# Altium PCB fsm.PcbDoc
Units mm, origin at the board's own origin, x right, y up, seen from the top; angles counter-clockwise.
Board outline 111 x 53 mm, 2 copper layers (Top Layer, Bottom Layer), stack 1.1 mm thick; 14 components, 24 nets, 102 pads, 16 vias.
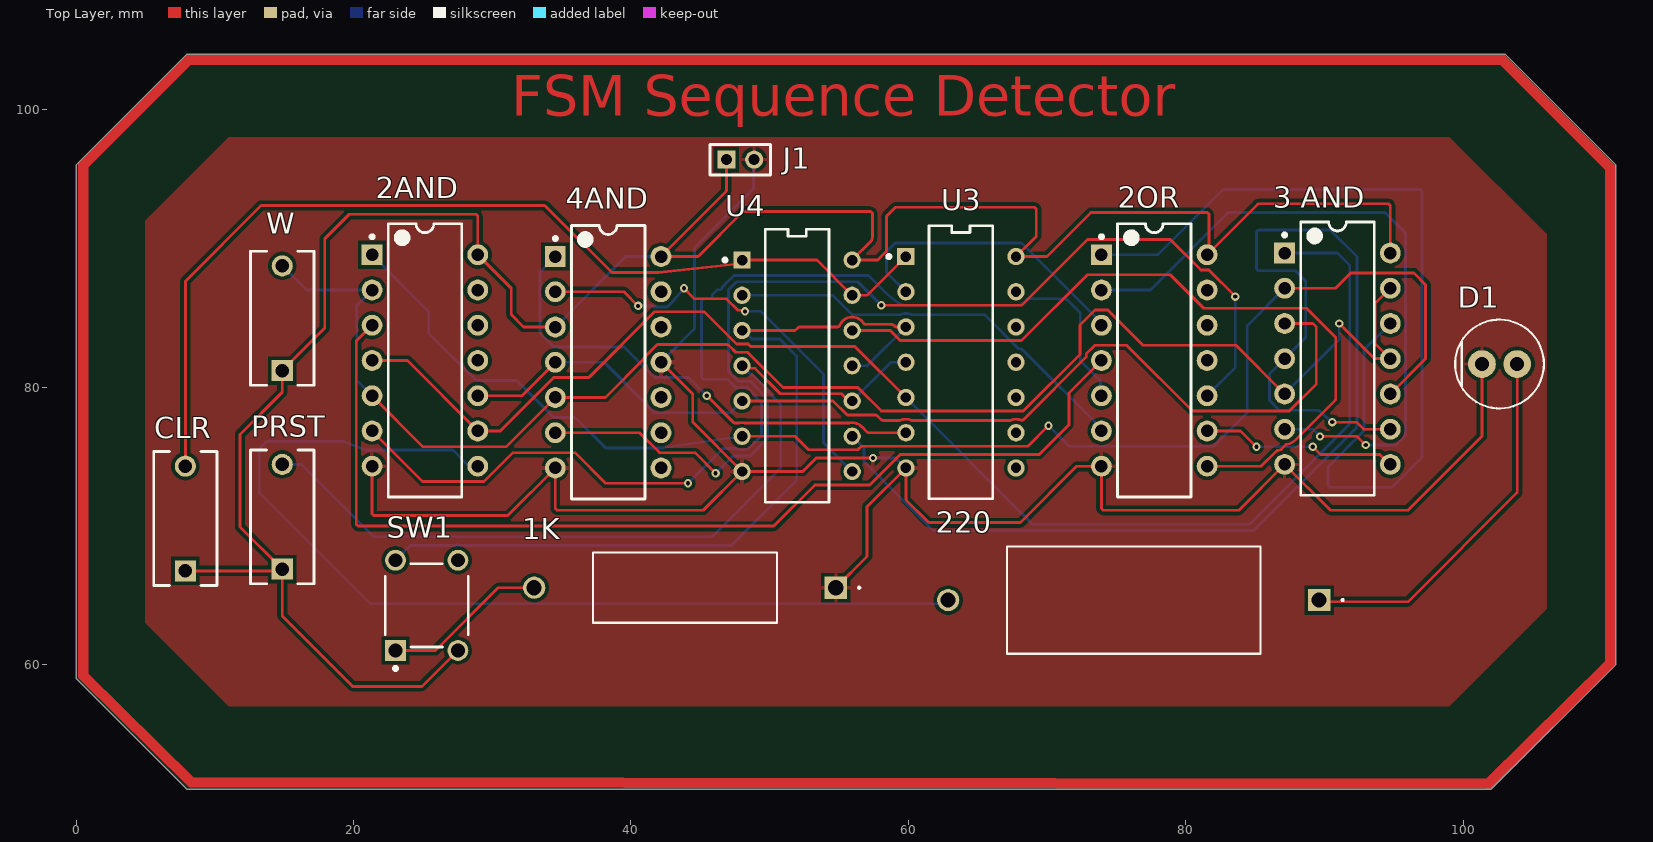
[diagram p0: Top Layer view]
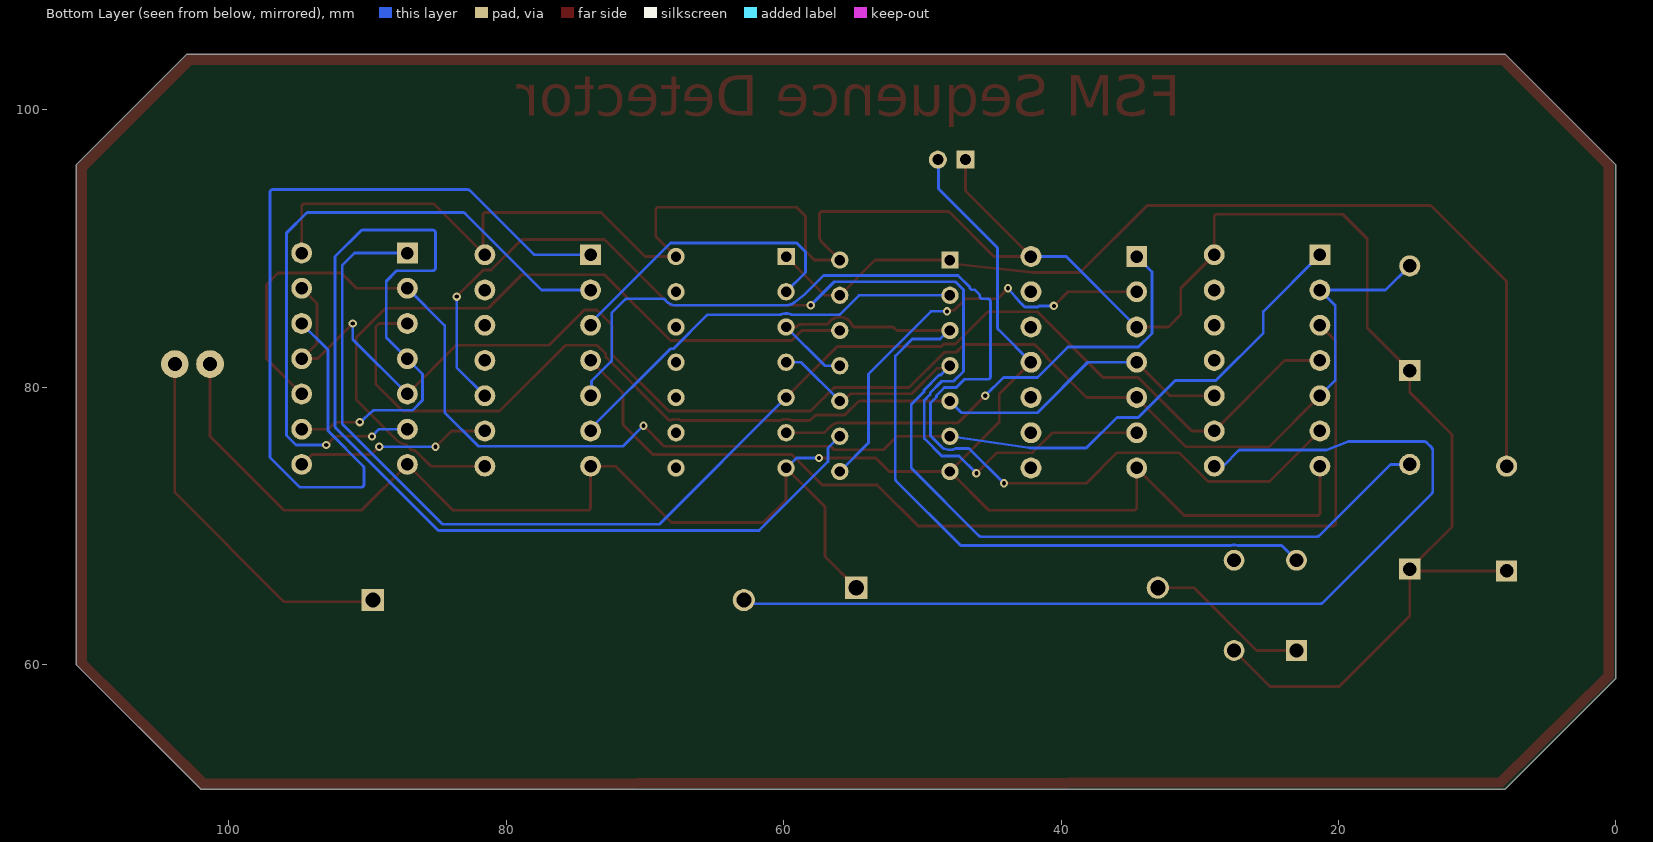
[diagram p1: Bottom Layer view, seen from below]
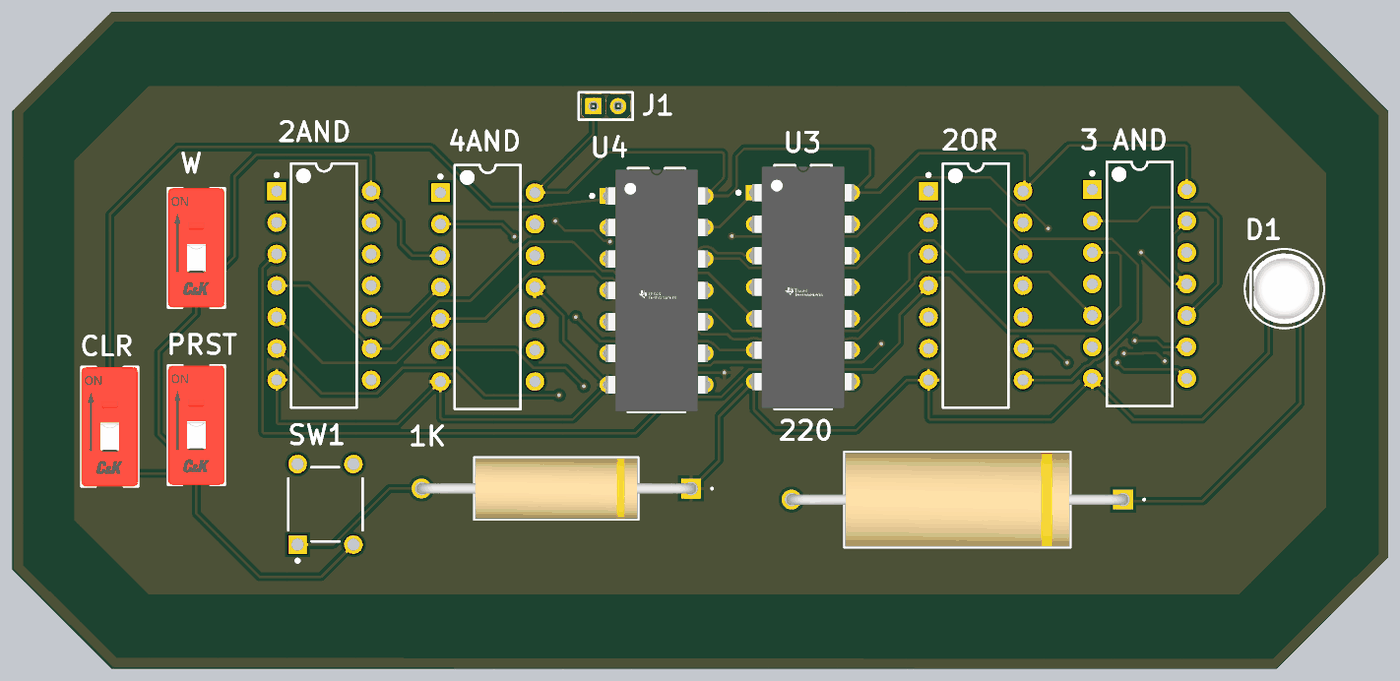
[diagram p2: 3D render of the assembled board from above, using the file's embedded part models]

## Layer stack, top to bottom
Top Solder: solder mask 0.05, SM-001, Dk 4
Top Layer: signal copper 0.1
Dielectric 1: dielectric 0.9, FR-4, Dk 4.8
Bottom Layer: signal copper 0.1
Bottom Solder: solder mask 0.05, SM-001, Dk 4

## Board outline
8,51 102,51 111,60 111,96 103,104 8,104 0,96 0,59

## Design rules (kind name [scope] priority, off if disabled: settings)
Clearance [All] p1: gap=0.25 ignorepadtopadclearanceinfootprint=FALSE
PolygonConnect [All] p1: connectstyle=Relief reliefconductorwidth=0.254 reliefentries=4 polygonreliefangle="90 Angle" airgapwidth=0.254
RoutingVias [All] p1: holewidth=0.4 width=0.5 viastyle="Through Hole" minholewidth=0.4 minwidth=0.5 maxholewidth=0.4 maxwidth=0.5
SolderMaskExpansion [All] p1: expansion=0.102 istentingtop=FALSE
UnpouredPolygon [All] p1: allowunpoured=TRUE allowshelved=TRUE
Width [All] p1: maxlimit=0.751 minlimit=0.1 preferedwidth=0.2
29 further rules are at their usual default settings.

## Classes and differential pairs
component class fsm: 1K 2AND 2OR "3 AND" 220 CLR D1 J1 PRST SW1 U3 U4 W

## Components (designator, comment, footprint, x,y, rotation, side; value= is the part's Value field where it differs from the comment)
1K "AC03000001001JAC00" RES_AC03_VIS 54.762,65.532 r180 top (schematic designator R2)
2AND "SN74AC08N" N0014A 25.146,81.915 r0 top (schematic designator U6)
2OR "SN74AHC32N" N0014A 77.724,81.915 r0 top (schematic designator U2)
"3 AND" "SN74LS11N" N0014A 90.932,82.042 r0 top (schematic designator U1)
4AND "SN74LS21N" N0014A 38.354,81.788 r0 top (schematic designator U5)
220 "AC05000002200JAC00" RES_AC05_VIS 89.611,64.643 r180 top
CLR "CLR" FP-BD01-MFG 7.874,70.52 r0 top (schematic designator SW2)
D1 "SFH 4550" FP-SFH_4550-MFG 102.616,81.661 r0 top
J1 "M22-2510205" FP-M22-2510205-MFG 47.879,96.393 r0 top
PRST "PRST" FP-BD01-MFG 14.859,70.647 r0 top (schematic designator SW3)
SW1 "1825910-6" TECO-1825910-6_V 25.273,64.262 r90 top
U3 "SN74HCT74N" FP-N0014A-MFG 63.787,81.788 r0 top
U4 "SN74HCT74N" FP-N0014A-MFG 51.976,81.534 r0 top
W "BD01" FP-BD01-MFG 14.859,84.963 r0 top

## Footprints (in the part's own frame and the unit in brackets; to place one, negate y for a bottom-side part, rotate by r counter-clockwise, add the part's x,y. Pads: shape width x height; smd on the part's side, far side on the other; paste and mask are expansions set on the pad)
FP-BD01-MFG [mm]
  rect 1.52x1.52 hole 0.97 paste-2539.97 mask+0: 1(0,-3.775)
  round 1.52 hole 0.97 paste-2539.97 mask+0: 2(0,3.775)
  silkscreen extent -2.28,-4.82 2.28,4.82, body extent -2.38,-4.92 2.38,4.92, height 0.25
FP-M22-2510205-MFG [mm]
  rect 1.3x1.3 hole 0.8 paste-2539.97 mask+0: 1(-1,0)
  round 1.3 hole 0.8 paste-2539.97 mask+0: 2(1,0)
  silkscreen extent -2.17,-1.1 2.17,1.1, body extent -2.27,-1.2 2.27,1.2, height 0.25
FP-N0014A-MFG [mm]
  rect 1.25x1.25 hole 0.75 paste-2539.97 mask+0: 1(-3.97,7.62)
  round 1.25 hole 0.75 paste-2539.97 mask+0: 2(-3.97,5.08) 3(-3.97,2.54) 4(-3.97,0) 5(-3.97,-2.54) 6(-3.97,-5.08) 7(-3.97,-7.62) 8(3.97,-7.62) 9(3.97,-5.08) 10(3.97,-2.54) 11(3.97,0) 12(3.97,2.54) 13(3.97,5.08) 14(3.97,7.62)
  silkscreen extent -5.32,-9.84 2.3,9.84, body extent -4.69,-9.94 4.69,9.94, height 0.25
FP-SFH_4550-MFG [mm]
  round 2 hole 1 paste-2539.97 mask+0: 1(-1.27,0) 2(1.27,0)
  silkscreen extent -3.2,-3.2 3.2,3.2, body extent -3.05,-3.05 3.05,3.05, height 0.25
N0014A [mm] "DIP, 14-Leads, Body 19.7x6.6mm, Pitch 2.54mm"
  rect 1.5x1.5 hole 0.9: 1(-3.81,7.62)
  round 1.5 hole 0.9: 2(-3.81,5.08) 3(-3.81,2.54) 4(-3.81,0) 5(-3.81,-2.54) 6(-3.81,-5.08) 7(-3.81,-7.62) 8(3.81,-7.62) 9(3.81,-5.08) 10(3.81,-2.54) 11(3.81,0) 12(3.81,2.54) 13(3.81,5.08) 14(3.81,7.62)
  silkscreen extent -3.93,-9.85 2.65,9.85, body extent -3.95,-9.85 3.95,9.85, height 5.08
RES_AC03_VIS [mil]
  rect 63x63 / inner round 60 / far side rect 63x63 hole 43 paste-99999 mask+0: 1(0,0)
  round 63 / inner round 60 / far side round 63 hole 43 paste-99999 mask+0: 2(856,0)
  silkscreen extent -70,-99 689,100, body extent -16,-95 873,95, height 189
RES_AC05_VIS [mil]
  rect 63x63 / inner round 60 / far side rect 63x63 hole 43 paste-99999 mask+0: 1(0,0)
  round 63 / inner round 60 / far side round 63 hole 43 paste-99999 mask+0: 2(1053,0)
  silkscreen extent -70,-152 886,153, body extent -16,-147 1069,147, height 295
TECO-1825910-6_V [mm] "Switch, 4-Leads, Body 5.99x5.99mm"
  rect 1.5x1.5 hole 0.99: 1(-3.25,2.25)
  round 1.5 hole 0.99: 2(3.25,2.25) 3(-3.25,-2.25) 4(3.25,-2.25)
  silkscreen extent -4.67,-2.99 2.99,3, body extent -3,-2.99 2.99,3, height 5

## Part data
1K: library part CMP-00030-39747202-1, "AC03000001001JAC00 Resistor, 1 kOhm, ± 5%, 3 W, Axial Leaded, Wirewound, General Purpose", Case/Package=Axial, Max Operating Temperature=275°C, Max Power Dissipation=3W, Min Operating Temperature=-40°C, Resistance=1kΩ, Temperature Coefficient=180ppm/°C, Tolerance=5%, Voltage Rating=55V, Composition=Wirewound, Contact Plating=Tin, Diameter=4.8mm, Features="Flame Retardant Coating", Lead Diameter=800µm, Length=13mm, Military Standard=Not, Mount="Through Hole", NexarPartId=39747202, Number of Pins=2, Number of Terminations=2, Packaging="Cut Tape (CT)", Power Rating=3W, Radiation Hardening=No, REACH SVHC=Unknown, RoHS=Compliant, Schedule B="8533210080, 8533210080", Termination=Axial, Voltage Rating (DC)=55V, Width=4.8mm
2AND: library part CMP-0777-00256-3, "Quadruple 2-Input Positive-AND Gates, N0014A, TUBE", F @ Nom Voltage(Max)(Mhz)=100, Generic Part Number=SN74AC08, ICC @ Nom Voltage(Max)(mA)=0.02, Manufacturer="Texas Instruments", Operating Temperature Range(C)="-40 to 85", Rating=Catalog, tpd @ Nom Voltage(Max)(ns)=10,8.5, Voltage(Nom)(V)=3.3,5, Bits(#)=4, DatasheetVersion=SCAS536D, Input Type=CMOS, Output Drive (IOL/IOH)(Max)(mA)=-24/24, Output Type=CMOS, PackageReference=N0014A, Schmitt Trigger=No, Technology Family=AC, VCC(Max)(V)=6, VCC(Min)(V)=2
2OR: library part CMP-1573-00149-3, "Quadruple 2-Input Positive-OR Gates, N0014A, TUBE", F @ Nom Voltage(Max)(Mhz)=70, Generic Part Number=SN74AHC32, ICC @ Nom Voltage(Max)(mA)=0.02, Manufacturer="Texas Instruments", Operating Temperature Range(C)="-40 to 125", Rating=Catalog, tpd @ Nom Voltage(Max)(ns)=13,8.5, Voltage(Nom)(V)=3.3,5, Bits(#)=4, Code_JEDEC=MS-001, DatasheetVersion=SCLS247I, Input Type=CMOS, Output Drive (IOL/IOH)(Max)(mA)=50/-50, Output Type=CMOS, PackageReference=N0014A, PackageVersion=http://www.ti.com/lit/ml/mpdi002c/mpdi002c.pdf, VCC(Max)(V)=5.5, VCC(Min)(V)=2
"3 AND": library part CMP-0777-00254-3, "Triple 3-input positive-AND gates, N0014A, TUBE", F @ Nom Voltage(Max)(Mhz)=35, Generic Part Number=SN74LS11, ICC @ Nom Voltage(Max)(mA)=0.0036, Manufacturer="Texas Instruments", Operating Temperature Range(C)="0 to 70", Rating=Catalog, tpd @ Nom Voltage(Max)(ns)=15, Voltage(Nom)(V)=5, Bits(#)=3, DatasheetVersion=SDLS131, Input Type=TTL, Output Drive (IOL/IOH)(Max)(mA)=0/8, Output Type=TTL, PackageReference=N0014A, Schmitt Trigger=No, Technology Family=LS, VCC(Max)(V)=5.25, VCC(Min)(V)=4.75
4AND: library part CMP-0777-00260-3, "Dual 4-input positive-AND gates, N0014A, TUBE", F @ Nom Voltage(Max)(Mhz)=35, Generic Part Number=SN74LS21, ICC @ Nom Voltage(Max)(mA)=0.0025, Manufacturer="Texas Instruments", Operating Temperature Range(C)="0 to 70", Rating=Catalog, tpd @ Nom Voltage(Max)(ns)=15, Voltage(Nom)(V)=5, Bits(#)=2, DatasheetVersion=SDLS139, Input Type=TTL, Output Drive (IOL/IOH)(Max)(mA)=-.04/8, Output Type=TTL, PackageReference=N0014A, Schmitt Trigger=No, Technology Family=LS, VCC(Max)(V)=5.25, VCC(Min)(V)=4.75
220: library part CMP-00030-39746845-1, "AC05000002200JAC00 Resistor, 220 Ohm, ± 5%, 5 W, Axial Leaded, Wirewound, General Purpose", Case/Package=Conformal, Max Operating Temperature=275°C, Max Power Dissipation=5W, Min Operating Temperature=-40°C, Resistance=220Ω, Temperature Coefficient=-10ppm/°C, Tolerance=5%, Voltage Rating=33V, Composition=Wirewound, Contact Plating=Tin, Diameter=7.5mm, Features="Flame Retardant Coating", Lead Diameter=800µm, Length=18mm, Military Standard=Not, NexarPartId=39746845, Number of Pins=2, Number of Terminations=2, Packaging="Cut Tape (CT)", Power Rating=5W, Radiation Hardening=No, REACH SVHC=Unknown, RoHS=Compliant, Schedule B="8533210080, 8533210080", Termination=Axial, Voltage Rating (DC)=33V, Width=7.493mm
CLR PRST W: library part CMP-10033-000004-1, "SWITCH SLIDE DIP SPST 100MA 5V", Capacitance=5pF, Case/Package=DIP, Contact Current Rating=25mA, Current Rating=100mA, Max Operating Temperature=85°C, Max Voltage Rating (DC)=25V, Min Operating Temperature=-40°C, Package Quantity=115, Voltage Rating (DC)=5V, Actuator Length=0.9mm, Actuator Material=Nylon, Actuator Type="Slide (Standard)", Approvals=UL, Body Material=PBT, Contact Material=Bronze, Contact Plating=Gold, Depth=9.65mm, Electrical Life=10000Cycles, Lead Free="Lead Free", Length=0.18inch, Life (Cycles)=10000Cycles, Material=Nylon, Max Current Rating=100mA, Mechanical Life=10000Cycles, Mount="Through Hole", Number of Circuits=1, Number of Poles=1, Number of Positions=1, Orientation=Straight, Packaging=Rail/Tube, Pitch=0.1inch, Radiation Hardening=No, REACH SVHC="No SVHC", RoHS Compliant=Yes, Series=BD, Terminal Pitch=2.54mm, Termination="PC Pin", Throw Configuration=SPST, Washable=Yes, Width=9.65mm
D1: library part CMP-62016-000011-1, "EMITTER IR 860NM 100MA RADIAL", Colour=Infrared, Forward Current=100mA, Forward Voltage=1.5V, Manufacturer="Osram Opto", Reverse Voltage=5V, Temperature="-40°C to +100°C", Temperature Range High=+100°C, Temperature Range Low=-40°C, Automotive=No, Category=Diode, ComponentLink2Description=Datasheet, ComponentLink2URL=https://dammedia.osram.info/media/resource/hires/osram-dam-5580407/SFH%204550_EN.pdf, Device Class L1=Optoelectronics, Device Class L2=LEDs, Device Class L3=unset, Digikey Description="EMITTER IR 860NM 100MA RADIAL", Lead Free=Yes, Led Orientation=Straight, Manufacturer Part Number="SFH 4550", Mouser Description="Infrared Emitters - High Power Infrared 850 nm HALF ANGLE +/-3DEG", Octopart=https://octopart.com/sfh+4550-osram+opto-55410894, Package="SFH 4550", Peak Emmision Wavelength=860nm, RoHS=TRUE, Viewing Angle=6°
J1: library part CMP-15831-000005-1, "CONN HEADER VERT 2POS 2MM", Current Rating=2A, Manufacturer=Harwin, Package=0, Temperature="-40°C to +105°C", Temperature Range High=+105°C, Temperature Range Low=-40°C, Automotive=No, Category=Conn, ComponentLink2Description=Datasheet, ComponentLink2URL=https://cdn.harwin.com/pdfs/C018XX_M22_Series_Connectors.pdf, Conn Gender=Male, Conn Orientation=Vertical, Contact Material=Gold,Nickel, Device Class L1=Connectors, Device Class L2="Headers and Wire Housings", Device Class L3=unset, Digikey Description="CONN HEADER VERT 2POS 2MM", Footprint Url=https://cdn.harwin.com/pdfs/M22-251.pdf, Height=5.45mm, Lead Free=Yes, Manufacturer Part Number=M22-2510205, Mouser Description="Headers & Wire Housings 2 PIN SIL VERTICAL GOLD PIN HEADER", Number Of Contacts=2, Number Of Rows=1, Octopart=https://octopart.com/m22-2510205-harwin-2538221, Pitch=2mm, RoHS=TRUE
SW1: library part CMP-1684-00021-1, "Tact Switch, SPST-NO, 0.05 A, -35 to 85 degC, 4-Pin THD, RoHS, Bulk", Actuator Color=Black, Contact Rating @ Voltage=0.05A@24VDC, Dielectric Strength=500VAC, Manufacturer="TE Connectivity", Maximum AC Voltage Rating=N/A, Maximum Contact Resistance=100mOhm, Maximum DC Voltage Rating=24V, Minimum Insulation Resistance=100MOhm, Operating Temperature=-35to85C, Package Description="4-Pin Through Hole Device, Body 5.99 x 5.99 mm, Pitch 6.5 mm", Package Reference=THD, Actuator Length=1.4mm, Actuator Material=PolybutyleneTerephthalate, Actuator Style=RoundButton, Base Material=N/A, Body Orientation=Straight, Bushing Type=Unthreaded, Contact Material=CopperAlloy, Contact Plating=Silver, Datasheet URL=http://www.te.com/commerce/DocumentDelivery/DDEController?Action=showdoc&DocId=Customer+Drawing%7F1825910%7FC9%7Fpdf%7FEnglish%7FENG_CD_1825910_C9.pdf%7F1825910-6, Datasheet Version="Rev. C9", Dimension=5.99x5mm, Electrical Life=100000Cycles, Family=1825910, Function=MomentaryContact, Housing Material=N/A, Illumination=N/R, Manufacturer URL=http://www.te.com, Mechanical Life=100000Cycles, Mounting=ThroughHole, Packaging=N/A, Part No=1825910-6, Pole Throw Configuration=SPST, Product Weight=N/A, RoHS=Yes, Seal Description=N/A, Seal Location=N/A, Switch Configuration=OFF(ON), Terminal Type=PCPins, Thread Size=N/R
U3 U4: library part CMP-1619-00757-3, "IC FF D-TYPE DUAL 1BIT 14DIP", Case/Package=PDIP, Frequency=46MHz, High Level Output Current=-4mA, Low Level Output Current=4mA, Max Frequency=24MHz, Max Operating Temperature=85°C, Max Supply Voltage=5.5V, Min Operating Temperature=-40°C, Min Supply Voltage=4.5V, Operating Supply Voltage=5V, Package Quantity=25, Quiescent Current=4uA, Clock Edge Trigger Type="Positive Edge", Contact Plating=Gold, Height=4.57mm, Lead Free="Lead Free", Length=19.3mm, Logic Function="AND GATE", Mount="Through Hole", Number of Bits=2, Number of Bits per Element=1, Number of Circuits=2, Number of Elements=2, Number of Input Lines=4, Number of Output Lines=2, Number of Pins=14, Output Current=4mA, Packaging=Rail/Tube, Polarity=Non-Inverting, Propagation Delay=28ns, Radiation Hardening=No, REACH SVHC="No SVHC", RoHS Compliant=Yes, Turn-On Delay Time=18ns, Weight=0.032734oz, Width=6.35mm

## Via types
v1: diameter 0.6, hole 0.3, Top Layer to Bottom Layer, tented both sides, 16 vias

## Nets (pads, with @x,y where several pads share a name; then routed paths per layer and width w, separated by ;. In a path a pad name is that pad's centre, name@x,y a point inside that pad or via, vN(x,y) a via of type N, cw(c..) or ccw(c..) an arc to the next point about the centre after c; other vN are vias at no path point)
GND: 1K.1 2AND.7 2OR.7 4AND.7 4AND.11 "3 AND.7" D1.1 J1.2 U3.7 U4.7 | length 146
  Top Layer w0.2: 2AND.7 21.336,70.856 21.453,70.739 31.115,70.739 4AND.7 34.544,71.237 34.661,71.12 45.212,71.12 U4.7 ; 4AND.11 44.45,79.502 44.45,77.47 U4.7 ; 1K.1 57.023,67.793 57.023,71.374 U3.7 59.817,71.965 ccw(c60.017,71.965) 59.875,71.824 61.41,70.289 ccw(c61.551,70.431) 61.551,70.231 68.072,70.231 72.136,74.295 2OR.7 73.914,71.237 74.031,71.12 83.82,71.12 87.122,74.422 90.424,71.12 96.012,71.12 101.346,76.454 D1.1 ; v1(57.445,74.889) 53.355,74.889 52.38,73.914 U4.7
  Bottom Layer w0.2: 4AND.11 44.518,84.142 ccw(c44.377,84.284) 44.577,84.284 44.577,89.961 cw(c44.777,89.96) 44.636,90.102 48.776,94.242 ccw(c48.634,94.383) 48.834,94.383 48.834,96.348 J1.2 ; v1(57.445,74.889) 59.077,74.889 59.798,74.168 U3.7
"Net220 _1": 220.1 D1.2 | length 26.9
  Top Layer w0.2: 220.1 89.738,64.516 96.012,64.516 103.886,72.39 D1.2
"Net220 _2": 2AND.8 220.2 | length 72.8
  Bottom Layer w0.2: 2AND.8 28.403,74.295 cw(c28.404,74.495) 28.263,74.353 27.203,75.413 ccw(c27.062,75.271) 27.062,75.471 20.873,75.471 cw(c20.873,75.671) 20.801,75.485 19.317,76.06 ccw(c19.245,75.873) 19.245,76.073 13.799,76.073 ccw(c13.799,75.873) 13.658,76.015 13.266,75.623 ccw(c13.408,75.482) 13.208,75.482 13.208,72.473 ccw(c13.408,72.473) 13.267,72.331 21.158,64.44 ccw(c21.299,64.582) 21.299,64.382 62.604,64.382 220.2
NetR2_2: 1K.2 SW1.1 | length 11.9
  Top Layer w0.2: SW1.1 25.897,61.012 30.417,65.532 1K.2
NetSW1_2: SW1.2 U3.3 U4.3 U4.11 | length 62.4
  Top Layer w0.2: U4.3 51.832,84.074 52.028,84.269 cw(c52.169,84.128) 52.169,84.328 54.863,84.328 ccw(c54.862,84.528) 55.046,84.45 cw(c55.946,84.074) 56.759,84.612 ccw(c56.925,84.724) 56.924,84.524 58.692,84.524 cw(c58.692,84.074) 59.011,84.392 59.016,84.386 ccw(c59.157,84.528) 59.157,84.328 U3.3
  Bottom Layer w0.2: SW1.2 24.032,68.521 cw(c24.174,68.38) 24.174,68.58 27.237,68.58 ccw(c27.236,68.78) 27.28,68.585 cw(c27.523,67.512) 27.766,68.585 ccw(c27.81,68.78) 27.809,68.58 47.161,68.58 ccw(c47.161,68.78) 47.303,68.639 51.884,73.22 ccw(c51.743,73.362) 51.943,73.362 51.943,82.248 50.721,83.47 48.711,83.47 48.107,84.074 U4.3 ; U4.11 57.023,81.534 U3.3
NetSW2_2: CLR.2 U3.1 U4.1 U4.13 | length 71.8
  Top Layer w0.2: CLR.2 7.874,87.63 13.335,93.091 33.699,93.091 cw(c33.699,92.891) 33.84,93.033 38.549,88.324 ccw(c38.691,88.465) 38.691,88.265 41.938,88.265 ccw(c41.938,88.465) 41.959,88.266 47.481,88.845 U4.1 53.406,89.154 U4.13 57.023,86.614 U3.1
NetSW3_2: PRST.2 U3.4 U4.4 U4.10 | length 62.7
  Top Layer w0.2: U4.4 48.189,81.351 48.931,81.351 50.763,79.519 55.163,79.519 55.688,78.994 U4.10
  Bottom Layer w0.2: PRST.2 16.256,74.422 21.404,69.274 ccw(c21.546,69.415) 21.546,69.215 45.764,69.215 ccw(c45.764,69.415) 45.906,69.274 50.741,74.109 ccw(c50.6,74.251) 50.8,74.251 50.8,78.657 ccw(c50.6,78.657) 50.741,78.799 49.881,79.659 49.881,79.771 48.783,80.869 48.671,80.869 U4.4 ; U4.10 58.74,81.788 U3.4
NetU1_1: 2AND.4 2AND.9 "3 AND.1" U3.5 | length 102
  Top Layer w0.2: 2AND.4 23.876,81.915 2AND.9 30.575,76.835 34.428,80.688 36.886,80.688 ccw(c36.886,80.888) 37.027,80.746 41.708,85.428 45.19,85.428 cw(c45.19,85.228) 45.332,85.369 47.602,83.099 48.456,83.099 48.624,82.931 56.134,82.931 U3.5
  Bottom Layer w0.2: U3.5 68.961,70.104 84.499,70.104 ccw(c84.499,70.304) 84.64,70.162 91.763,77.285 ccw(c91.621,77.426) 91.821,77.426 91.821,88.773 90.932,89.662 87.122,89.662
NetU1_2: 2AND.1 "3 AND.2" "3 AND.10" U4.6 | length 102.5
  Top Layer w0.2: U4.6 51.832,76.454 52.807,75.479 56.35,75.479 56.604,75.733 68.621,75.733 v1(70.104,77.216) ; 87.122,87.122 90.786,87.122 91.886,88.222 96.436,88.222 97.282,87.376 97.282,82.042 94.742,79.502
  Bottom Layer w0.2: 2AND.1 25.413,85.458 25.413,83.902 28.84,80.475 31.761,80.475 34.428,77.808 35.964,77.808 38.105,75.667 ccw(c38.246,75.809) 38.246,75.609 42.164,75.608 ccw(c42.164,76.708) 42.323,75.619 U4.6 ; v1(70.104,77.216) 71.585,75.735 81.99,75.735 84.431,78.177 84.431,84.431 87.122,87.122
NetU1_3: 2AND.10 4AND.4 "3 AND.3" U4.5 | length 75.5
  Top Layer w0.2: 2AND.10 32.131,79.375 4AND.4 ; U4.5 54.567,78.994 55.525,78.037 ccw(c55.666,78.178) 55.666,77.978 57.622,77.978 cw(c57.622,77.778) 57.763,77.919 58.027,77.656 ccw(c58.168,77.797) 58.168,77.597 59.377,77.597 ccw(c59.376,77.797) 59.45,77.611 cw(c59.817,76.708) 60.184,77.611 ccw(c60.258,77.797) 60.257,77.597 67.317,77.597 ccw(c67.316,77.797) 67.39,77.611 cw(c67.757,76.708) 68.1,77.621 ccw(c68.169,77.808) 68.311,77.667 72.814,82.17 72.814,82.371 73.458,83.015 75.735,83.015 80.475,78.275 87.451,78.275 89.408,80.232 89.408,84.327 89.153,84.582 87.122,84.582
  Bottom Layer w0.2: 4AND.4 38.068,81.788 41.708,78.148 47.16,78.148 U4.5
NetU1_4: "3 AND.4" "3 AND.9" U4.9 | length 89
  Top Layer w0.2: v1(90.551,77.47) 92.309,77.47 92.817,76.962 94.742,76.962
  Bottom Layer w0.2: U4.9 56.795,75.605 56.795,74.62 61.761,69.654 84.811,69.654 ccw(c84.811,69.854) 84.952,69.712 92.271,77.031 ccw(c92.129,77.172) 92.329,77.172 92.329,89.408 90.483,91.254 ccw(c90.341,91.113) 90.341,91.313 85.29,91.313 ccw(c85.29,91.113) 85.09,91.113 85.09,88.592 ccw(c85.29,88.592) 85.29,88.392 87.884,88.392 88.646,87.63 88.646,83.566 87.122,82.042 86.022,80.942 86.022,79.046 86.747,78.322 89.497,78.322 cw(c89.495,78.122) 89.626,78.273 v1(90.551,77.47)
NetU1_5: 2AND.2 2AND.5 4AND.5 "3 AND.5" "3 AND.11" "3 AND.13" W.2 | length 112.3
  Top Layer w0.2: 2AND.5 25.019,75.692 30.988,75.692 4AND.5 38.15,79.248 41.064,82.162 41.064,82.244 41.82,82.999 cw(c41.961,82.858) 41.961,83.058 46.924,83.058 cw(c46.924,82.858) 47.065,82.999 47.556,82.509 48.41,82.509 50.95,79.969 56.35,79.969 58.046,78.273 68.281,78.273 72.364,82.356 72.364,84.461 73.458,85.555 74.37,85.555 75.958,83.966 75.958,83.959 76.903,83.015 83.609,83.015 87.122,79.502 ; v1(91.059,84.582) 93.584,82.057 94.727,82.057 ; 94.742,82.042 94.727,82.057 ; 94.742,87.122 93.642,86.022 93.642,83.142 94.727,82.057
  Bottom Layer w0.2: W.2 16.602,86.995 2AND.2 20.236,85.895 20.236,80.475 2AND.5 ; 87.122,79.502 91.059,83.439 v1(91.059,84.582)
NetU1_6: 2OR.2 "3 AND.6" | length 48.9
  Top Layer w0.2: v1(89.677,76.439) 92.245,76.454 cw(c92.246,76.254) 92.387,76.396 v1(92.964,75.819)
  Bottom Layer w0.2: 2OR.2 77.438,86.995 82.968,92.524 cw(c83.109,92.383) 83.109,92.583 94.278,92.583 cw(c94.278,92.383) 94.419,92.525 95.784,91.16 cw(c95.642,91.019) 95.842,91.019 95.842,76.506 95.155,75.819 v1(92.964,75.819) ; 87.122,76.962 89.154,76.962 v1(89.677,76.439)
NetU1_8: 2OR.9 "3 AND.8" | length 14.2
  Top Layer w0.2: 2OR.9 83.947,76.835 v1(85.09,75.692) ; v1(89.154,75.692) 89.703,75.143 93.978,75.143 94.699,74.422 94.742,74.422
  Bottom Layer w0.2: v1(85.09,75.692) v1(89.154,75.692)
NetU1_12: 2OR.1 "3 AND.12" | length 65.5
  Bottom Layer w0.2: 2OR.1 77.895,89.535 ccw(c77.895,89.735) 78.036,89.593 82.619,94.176 cw(c82.76,94.034) 82.76,94.234 96.828,94.234 cw(c96.828,94.034) 97.028,94.034 97.028,74.93 94.928,72.83 cw(c94.786,72.971) 94.786,72.771 90.454,72.771 cw(c90.454,72.971) 90.254,72.971 90.254,74.169 cw(c90.454,74.169) 90.312,74.31 92.779,76.777 ccw(c92.637,76.918) 92.837,76.918 92.837,82.594 cw(c93.037,82.594) 92.895,82.735 94.742,84.582
NetU2_3: 2OR.3 U3.2 | length 21.8
  Bottom Layer w0.2: U3.2 58.42,88.265 58.42,89.756 59.047,90.383 68.161,90.383 73.914,84.63 2OR.3
NetU2_4: 2AND.3 2OR.4 | length 74.9
  Top Layer w0.2: 2AND.3 20.193,83.312 20.193,70.094 20.31,69.977 50.292,69.977 53.254,72.939 57.209,72.939 59.413,75.143 69.428,75.143 71.567,77.282 71.567,79.568 2OR.4
NetU2_5: 2AND.6 2OR.5 | length 82
  Top Layer w0.2: 2AND.6 24.976,73.195 29.412,73.195 31.485,75.268 35.952,75.268 38.152,73.068 v1(44.112,73.068)
  Bottom Layer w0.2: v1(44.112,73.068) 46.55,75.506 cw(c46.692,75.365) 46.692,75.565 47.566,75.565 cw(c47.565,75.365) 47.639,75.551 ccw(c48.006,76.454) 48.277,75.517 48.469,75.573 ccw(c48.413,75.765) 48.554,75.624 49.345,76.414 ccw(c49.203,76.555) 49.403,76.555 49.403,78.864 48.981,79.286 48.981,79.398 48.41,79.969 47.556,79.969 46.966,80.559 45.285,80.559 cw(c45.285,80.759) 45.085,80.759 45.085,86.16 cw(c45.285,86.16) 45.285,86.36 45.657,86.36 ccw(c45.656,86.56) 45.85,86.512 45.85,86.647 46.022,86.82 46.213,87.01 46.464,87.01 46.581,87.127 46.581,87.204 47.416,88.039 57.125,88.039 58.481,86.683 ccw(c58.622,86.824) 58.498,86.667 59.213,86.103 ccw(c59.817,86.868) 59.817,85.893 67.757,85.893 ccw(c67.757,86.868) 68.536,86.281 cw(c68.695,86.16) 68.694,86.36 71.29,86.36 cw(c71.29,86.16) 71.431,86.301 72.393,85.34 72.393,81.881 73.848,80.425 73.848,79.441 2OR.5
NetU2_6: 2OR.6 U4.2 | length 30.1
  Bottom Layer w0.2: U4.2 54.567,86.614 55.906,85.276 ccw(c56.047,85.417) 56.047,85.217 59.377,85.217 ccw(c59.376,85.417) 59.45,85.231 cw(c59.817,84.328) 60.184,85.231 ccw(c60.258,85.417) 60.257,85.217 65.406,85.217 cw(c65.406,85.017) 65.548,85.158 67.943,82.763 68.161,82.763 73.914,77.01 2OR.6
NetU2_8: 2OR.8 U4.12 | length 54.6
  Top Layer w0.2: U4.12 58.692,84.074 59.413,83.353 68.161,83.353 72.903,88.095 78.878,88.095 81.291,85.682 88.689,85.682 90.805,83.566 90.805,79.172 cw(c90.605,79.172) 90.747,79.031 87.9,76.184 ; 2OR.8 85.439,74.295 86.524,75.379 cw(c86.665,75.238) 86.619,75.432 86.811,75.479 ccw(c86.764,75.673) 86.905,75.531 87.196,75.822 cw(c87.337,75.68) 87.303,75.877 ccw(c87.122,76.962) 87.899,76.184
NetU2_10: 2OR.10 4AND.6 | length 79.2
  Top Layer w0.2: 4AND.6 40.608,76.708 42.048,75.268 44.62,75.268 v1(46.101,73.787) ; v1(58.039,85.9) 58.046,85.893 68.161,85.893 72.903,90.635 78.878,90.635 81.078,88.435 81.65,88.435 v1(83.566,86.519) v1@83.566,86.36
  Bottom Layer w0.2: v1(46.101,73.787) 47.343,75.029 48.596,75.029 49.853,76.286 49.853,79.051 49.431,79.473 49.431,79.584 48.596,80.419 47.742,80.419 47.031,81.13 47.031,87.018 47.602,87.589 56.35,87.589 v1(58.039,85.9) ; 2OR.10 83.566,81.407 v1(83.566,86.519)
NetU3_6: 4AND.1 U3.6 | length 35.3
  Top Layer w0.2: v1(45.466,79.375) 47.375,77.466 ccw(c47.516,77.608) 47.516,77.408 47.784,77.408 ccw(c47.783,77.608) 47.82,77.411 cw(c48.006,76.454) 48.192,77.411 ccw(c48.229,77.608) 48.228,77.408 55.724,77.408 ccw(c55.723,77.608) 55.76,77.411 cw(c55.946,76.454) 56.15,77.407 cw(c55.946,76.454) 56.635,77.144 57.012,76.767 ccw(c57.154,76.908) 57.154,76.708 U3.6
  Bottom Layer w0.2: 4AND.1 33.444,88.308 33.444,83.872 34.428,82.888 39.508,82.888 41.708,80.688 44.153,80.688 v1(45.466,79.375)
NetU4_8: 4AND.2 U4.8 | length 30.8
  Top Layer w0.2: 4AND.2 39.497,86.868 v1(40.513,85.852) ; v1(43.815,87.122) 44.577,86.36 46.482,86.36 46.881,86.36 47.707,85.535 48.14,85.535 v1(48.217,85.458)
  Bottom Layer w0.2: v1(40.513,85.852) 41.578,85.852 41.662,85.768 42.529,85.768 ccw(c42.529,85.968) 42.669,85.825 42.931,86.079 ccw(c42.164,86.868) 43.006,86.16 v1(43.815,87.122) ; v1(48.217,85.458) 49.369,85.458 53.879,80.949 53.879,75.981 U4.8
VCC: 2AND.14 2OR.14 4AND.3 4AND.14 "3 AND.14" CLR.1 J1.1 PRST.1 SW1.3 U3.14 U4.14 W.1 | length 173.2
  Top Layer w0.2: CLR.1 14.732,66.745 PRST.1 ; SW1.3 24.931,58.42 19.939,58.42 14.859,63.5 PRST.1 ; 4AND.3 32.258,84.328 31.369,85.217 31.369,87.122 2AND.14 28.956,92.256 ccw(c28.756,92.256) 28.756,92.456 19.685,92.456 17.92,90.691 17.92,84.249 W.1 14.859,79.629 11.811,76.581 11.811,69.92 PRST.1 ; J1.1 46.879,94.206 cw(c46.679,94.206) 46.821,94.065 4AND.14 44.748,89.408 ccw(c44.748,89.608) 44.889,89.466 48.009,92.586 cw(c48.15,92.444) 48.013,92.59 48.03,92.606 cw(c48.167,92.461) 48.166,92.661 57.204,92.661 cw(c57.204,92.461) 57.404,92.461 57.404,90.805 cw(c56.938,90.805) 57.268,90.476 U4.14 57.785,89.154 58.361,89.73 ccw(c58.22,89.872) 58.42,89.872 58.42,92.246 cw(c58.62,92.246) 58.479,92.388 59.055,92.964 69.098,92.964 69.215,92.847 69.215,90.866 U3.14 69.977,89.408 73.152,92.583 81.544,92.583 81.661,92.466 2OR.14@81.661,89.662 ; 2OR.14 2OR.14@81.661,89.662 ; 94.742,89.662 94.742,93.018 ccw(c94.542,93.018) 94.542,93.218 85.3,93.218 ccw(c85.3,93.018) 85.158,93.159 2OR.14@81.661,89.662
  Bottom Layer w0.2: 4AND.3 39.624,89.408 4AND.14
pads on no net: 2AND.11 2AND.12 2AND.13 2OR.11 2OR.12 2OR.13 4AND.8 4AND.9 4AND.10 4AND.12 4AND.13 SW1.4 U3.8 U3.9 U3.10 U3.11 U3.12 U3.13
copper on no net: | length 305.8
  Top Layer w0.75: 0.5,59.2 0.5,96 8.1,103.6 102.8,103.6 110.6,95.8 110.6,60.1 101.8,51.4 8.3,51.5 0.5,59.2

## Polygon pours and split planes (outlines as drawn)
GND on Top Layer "GND_L01_P000" (solid, remove dead copper, pour order 0): 11,98 99,98 106,91 106,64 99,57 11,57 5,63 5,92

## Other copper
Top Layer:
  text "FSM Sequence Detector" at 31.354,98.6 h5